# Altium PCB PCB1.PcbDoc
Units mil, origin at the board's own origin, x right, y up, seen from the top; angles counter-clockwise.
Board outline 3930 x 3930 mil, 2 copper layers (Top Layer, Bottom Layer); 22 components, 10 nets, 50 pads, 0 vias.
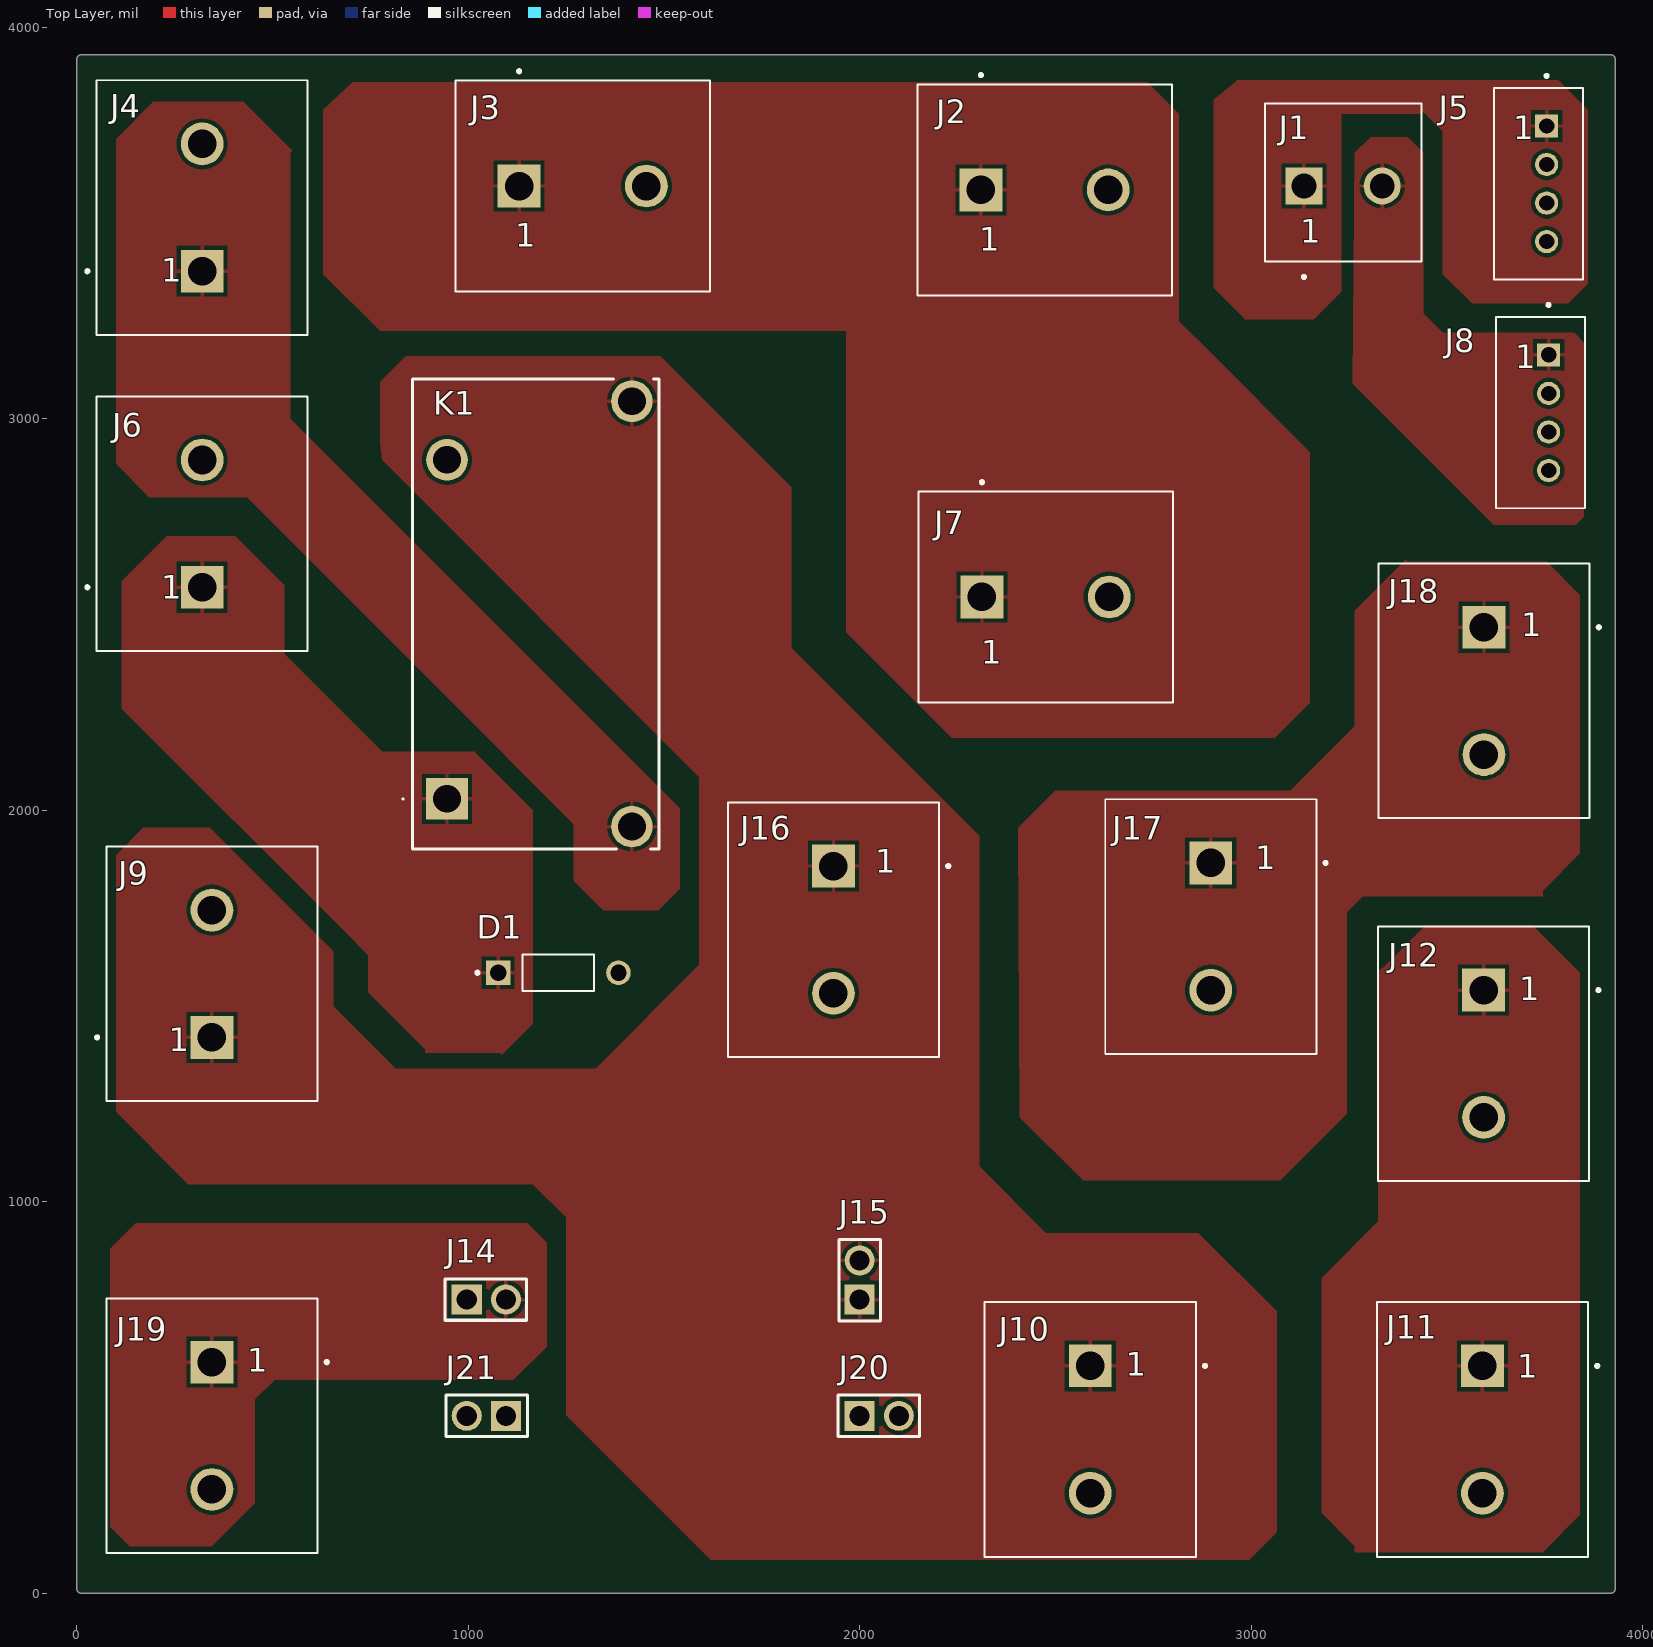
[diagram p0: Top Layer view]
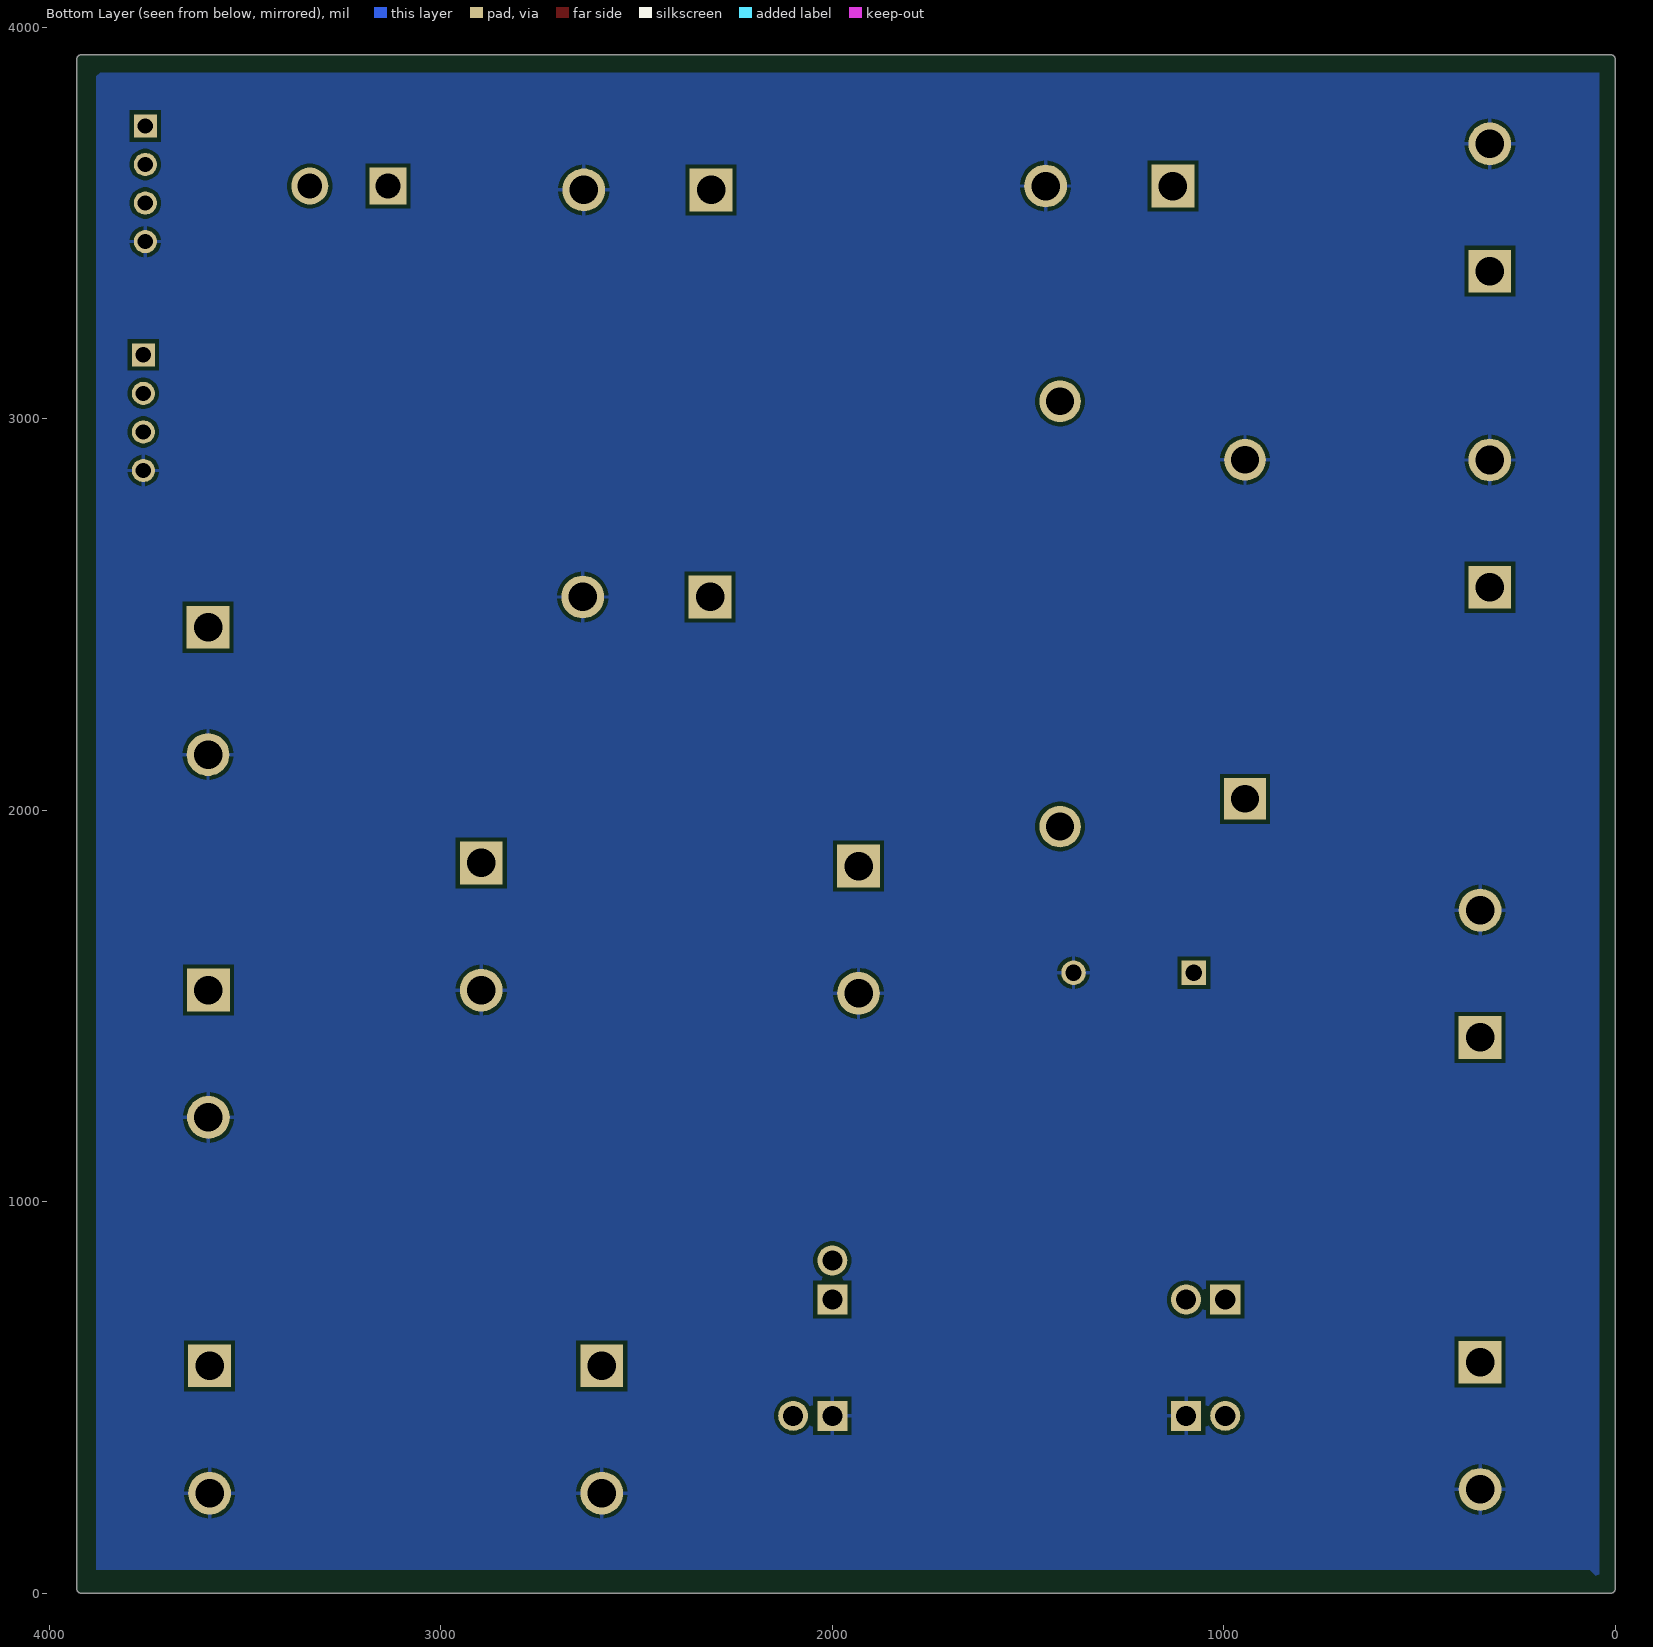
[diagram p1: Bottom Layer view, seen from below]
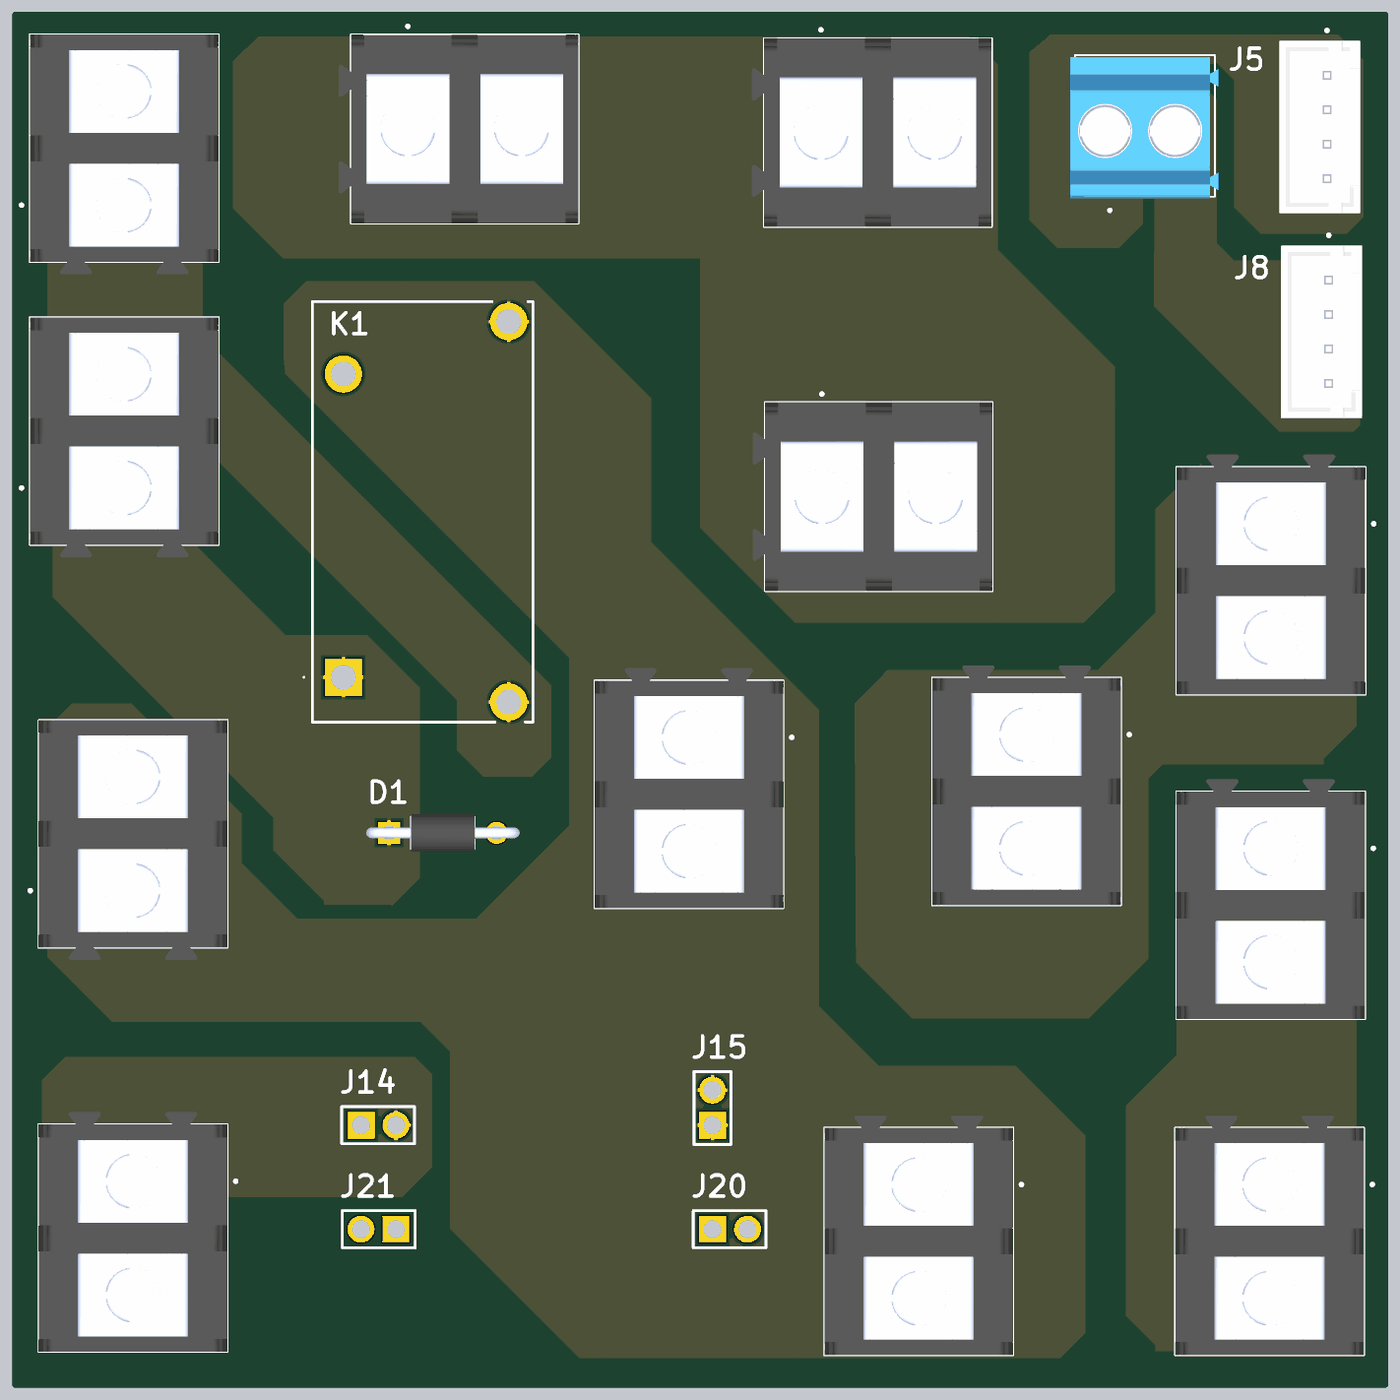
[diagram p2: 3D render of the assembled board from above, using the file's embedded part models]

## Layer stack, top to bottom
Top Solder: solder mask 0.4, Solder Resist, Dk 3.5
Top Layer: signal copper 1.4
Dielectric 1: dielectric 12.6, FR-4, Dk 4.8
Bottom Layer: signal copper 1.4
Bottom Solder: solder mask 0.4, Solder Resist, Dk 3.5

## Board outline
10,0 3920,0 ccw(c3920,10) 3930,10 3930,3920 ccw(c3920,3920) 3920,3930 10,3930 ccw(c10,3920) 0,3920 0,10 ccw(c10,10)

## Design rules (kind name [scope] priority, off if disabled: settings)
Clearance [All] p1: gap=10 ignorepadtopadclearanceinfootprint=FALSE
PolygonConnect [All] p1: connectstyle=Relief reliefconductorwidth=10 reliefentries=4 polygonreliefangle="90 Angle" airgapwidth=10
RoutingVias [All] p1: holewidth=28 width=50 viastyle="Through Hole" minholewidth=28 minwidth=50 maxholewidth=28 maxwidth=50
SolderMaskExpansion [All] p1: expansion=4 istentingtop=FALSE
SupplyNets "Schematic Supply Nets_8" [InNet('+VCC')] p1: voltage=0.000
SupplyNets "Schematic Supply Nets_6" [InNet('+5VCC_J')] p2: voltage=0.000
SupplyNets "Schematic Supply Nets_5" [InNet('+VBAT1')] p3: voltage=0.000
SupplyNets "Schematic Supply Nets_4" [InNet('+5VCC_M')] p4: voltage=0.000
SupplyNets "Schematic Supply Nets_3" [InNet('+12VCC_L')] p5: voltage=0.000
SupplyNets "Schematic Supply Nets_2" [InNet('GND')] p6: voltage=0.000
SupplyNets "Schematic Supply Nets_1" [InNet('+VBAT2')] p7: voltage=0.000
SupplyNets "Schematic Supply Nets" [InNet('+VCC2')] p8: voltage=0.000
Width [All] p1: maxlimit=500 minlimit=10 preferedwidth=10 minimp=50.000000 maximp=50.000000 favimp=50.000000
30 further rules are at their usual default settings.

## Components (designator, comment, footprint, x,y, rotation, side; value= is the part's Value field where it differs from the comment)
D1 "1N4007-T" DIOAD780W78L463D236 1230,1585 r0 top
J1 "TB007-508-02BE" CUI_TB007-508-02BE 3135,3595 r0 top
J2 "1977477-2" TE_1977477-2 2472.4,3585 r0 top
J3 "1977477-2" TE_1977477-2 1292.4,3595 r0 top
J4 "1977477-2" TE_1977477-2 320,3540 r90 top
J5 "B4B-XH-A(LF)(SN)" JST_B4B-XH-A(LF)(SN) 3734.33,3600.79 r90 top
J6 "1977477-2" TE_1977477-2 320,2732.4 r90 top
J7 "1977477-2" TE_1977477-2 2475,2545 r0 top
J8 "B4B-XH-A(LF)(SN)" JST_B4B-XH-A(LF)(SN) 3739.33,3015.79 r90 top
J9 "1977477-2" TE_1977477-2 345,1582.4 r90 top
J10 "1977477-2" TE_1977477-2 2589,418 r270 top
J11 "1977477-2" TE_1977477-2 3591,418 r270 top
J12 "1977477-2" TE_1977477-2 3594,1378 r270 top
J14 "61300211121" HDRV2W110P0X254_1X2_508X254X854P 996,750 r0 top
J15 "61300211121" HDRV2W110P0X254_1X2_508X254X854P 2000,750 r90 top
J16 "1977477-2" TE_1977477-2 1933,1695 r270 top
J17 "1977477-2" TE_1977477-2 2897,1703 r270 top
J18 "1977477-2" TE_1977477-2 3595,2305 r270 top
J19 "1977477-2" TE_1977477-2 345,427.4 r270 top
J20 "61300211121" HDRV2W110P0X254_1X2_508X254X854P 2000,453 r0 top
J21 "61300211121" HDRV2W110P0X254_1X2_508X254X854P 1096,453 r180 top
K1 "G4A-1A-E-DC12" G4A1AEDC12 945.56,2029.25 r90 top

## Footprints (in the part's own frame and the unit in brackets; to place one, negate y for a bottom-side part, rotate by r counter-clockwise, add the part's x,y. Pads: shape width x height; smd on the part's side, far side on the other; paste and mask are expansions set on the pad)
CUI_TB007-508-02BE [mm]
  rect 2.4x2.4 / inner round 2.4 / far side rect 2.4x2.4 hole 1.6: 1(0,0)
  round 2.4 hole 1.6: 2(5.08,0)
  silkscreen extent -2.54,-6 7.62,5.35, body extent -2.89,-5.04 7.87,5.21, height 14
DIOAD780W78L463D236 [mm]
  round 1.59 hole 1.06: A(3.905,0)
  rect 1.59x1.59 / inner round 1.59 / far side rect 1.59x1.59 hole 1.06: K(-3.905,0)
  silkscreen extent -5.35,-1.18 2.32,1.18, body extent -5.57,-1.35 5.57,1.35, height 2.7
G4A1AEDC12 [mm]
  rect 2.7x2.7 hole 1.8: 1(0,0)
  round 2.7 hole 1.8: 2(22,0) 3(25.8,-12) 4(-1.8,-12)
  silkscreen extent -3.25,-13.75 27.25,2.9
HDRV2W110P0X254_1X2_508X254X854P [mm]
  rect 1.95x1.95 / inner round 1.95 / far side rect 1.95x1.95 hole 1.3: 1(0,0)
  round 1.95 hole 1.3: 2(2.54,0)
  silkscreen extent -1.4,-1.35 3.89,1.35
JST_B4B-XH-A(LF)(SN) [mm]
  rect 1.508x1.508 / inner round 1.508 / far side rect 1.508x1.508 hole 1: 1(3.75,-0.525)
  round 1.508 hole 1: 2(1.25,-0.525) 3(-1.25,-0.525) 4(-3.75,-0.525)
  silkscreen extent -6.2,-2.88 7.1,2.88, body extent -6.2,-2.88 6.2,2.88, height 7
TE_1977477-2 [mm]
  rect 2.775x2.775 / inner round 2.775 / far side rect 2.775x2.775 hole 1.85: 1(-4.13,0)
  round 2.775 hole 1.85: 2(4.13,0)
  silkscreen extent -8.26,-6.85 8.26,7.55, body extent -9.15,-6.85 8.25,6.85, height 14.8

## Part data
D1: "Diode Standard 1000 V 1A Through Hole DO-41", Package="DO-41 NTE Electronics", Check_prices=https://www.snapeda.com/parts/1N4007/Yangjie+Electronic+Technology/view-part/?ref=eda, MF="Yangjie Technology", MP=1N4007, SnapEDA_Link=https://www.snapeda.com/parts/1N4007/Yangjie+Electronic+Technology/view-part/?ref=snap
J1: "2~24 Poles, Screw Type, Horizontal, 5.08 Pitch, 24~12 (AWG), Terminal Block Connector", Package=None, Check_prices=https://www.snapeda.com/parts/TB007-508-02BE/Same+Sky/view-part/?ref=eda, MF="Same Sky", MP=TB007-508-02BE, SnapEDA_Link=https://www.snapeda.com/parts/TB007-508-02BE/Same+Sky/view-part/?ref=snap
J2 J3 J4 J6 J7 J9 J10 J11 J12 J16 J17 J18 J19: "Buchanan, Module Dual Barrier, .325 CL, 2 Pos.", Package=None, Check_prices=https://www.snapeda.com/parts/1977477-2/TE+Connectivity+AMP+Connectors/view-part/?ref=eda, MF="TE Connectivity", MP=1977477-2, SnapEDA_Link=https://www.snapeda.com/parts/1977477-2/TE+Connectivity+AMP+Connectors/view-part/?ref=snap
J5 J8: "Connector Header Through Hole 4 position 0.098 (2.50mm)", Package=None, Check_prices=https://www.snapeda.com/parts/B4B-XH-A(LF)(SN)/JST+Sales+America+Inc./view-part/?ref=eda, MF="JST Sales", MP=B4B-XH-A(LF)(SN), SnapEDA_Link=https://www.snapeda.com/parts/B4B-XH-A(LF)(SN)/JST+Sales+America+Inc./view-part/?ref=snap
J14 J15 J20 J21: "WURTH ELEKTRONIK - 61300211121 - HEADER, 2.54MM, PIN, THT, VERTICAL, 2WAY", Manufacturer_Name="Wurth Elektronik", Mouser Part Number=710-61300211121, Datasheet Link=https://componentsearchengine.com/Datasheets/2/61300211121.pdf, Geometry.Height=8.54mm, Manufacturer_Part_Number=61300211121, Mouser Price/Stock=https://www.mouser.co.uk/ProductDetail/Wurth-Elektronik/61300211121?qs=t4813l51qx%252B1A5GYDQxPlw%3D%3D
K1: "General Purpose Relays SPST-NO 12VDC PCB & QC", Manufacturer_Name="Omron Electronics", Mouser Part Number=653-G4A-1AE-DC12, Datasheet Link=https://omronfs.omron.com/en_US/ecb/products/pdf/en-g4a.pdf, Geometry.Height=33.5mm, Manufacturer_Part_Number=G4A-1A-E-DC12, Mouser Price/Stock=https://www.mouser.co.uk/ProductDetail/Omron-Electronics/G4A-1A-E-DC12?qs=sQVrL4YZhsSR4KC%252B99SM1w%3D%3D

## Nets (pads, with @x,y where several pads share a name; then routed paths per layer and width w, separated by ;. In a path a pad name is that pad's centre, name@x,y a point inside that pad or via, vN(x,y) a via of type N, cw(c..) or ccw(c..) an arc to the next point about the centre after c; other vN are vias at no path point)
+5VCC_J: J11.1 J12.1
+5VCC_M: J14.2 J19.1
+12VCC_L: J17.1 J18.1
+VBAT1: J1.1 J5.1
+VBAT2: J1.2 J8.1
+VCC: J2.1 J3.1 J7.1
+VCC2: J9.1 J10.1 J15.1 J15.2 J16.1 K1.3
GND: D1.A J2.2 J3.2 J4.2 J5.4 J6.2 J7.2 J8.4 J9.2 J10.2 J11.2 J12.2 J16.2 J17.2 J18.2 J19.2 J20.1 J21.1 K1.2
NetD1_K: D1.K J6.1 K1.1
NetJ4_1: J4.1 K1.4
pads on no net: J5.2 J5.3 J8.2 J8.3 J14.1 J20.2 J21.2

## Polygon pours and split planes (outlines as drawn)
GND on Bottom Layer "GND_L02_P002" (solid, pour order 2): 40,3885 3870,3885 3880,3875 3880,60 65,60 40,35
+VBAT2 on Top Layer "+VBAT2_L01_P005" (solid, pour order 5): 3305.2,3720 3400,3720 3440,3680 3440,3270 3490,3220 3825,3220 3850,3195 3850,2750 3830,2730 3620,2730 3260,3090 3264.68,3679.8
+5VCC_M on Top Layer "+5VCC_M_L01_P017" (solid, pour order 17): 150,945 1150,945 1200,895 1200,630 1115,545 505,545 455,495 455,230 345,120 135,120 85,170 85,880
+VCC2 on Top Layer "+VCC2_L01_P016" (solid, pour order 16): 775,2940 775,3095 840,3160 1490,3160 1825,2825 1825,2415 2160,2080 2305,1935 2305,1090 2475,920 2865,920 3065,720 3065,155 2995,85 1620,85 1250,455 1250,960 1165,1045 285,1045 100,1230 100,1885 170,1955 340,1955 655,1640 655,1500 815,1340 1325,1340 1590,1605 1590,1685 1590,2085 780,2895
NetJ4_1 on Top Layer "NETJ4_1_L01_P013" (solid, pour order 13): 100,3715 195,3810 425,3810 550,3685 545,3680 545,3000 1540,2005 1540,1800 1485,1745 1345,1745 1270,1820 1270,1965 935,2300 795,2440 435,2800 185,2800 100,2885
NetD1_K on Top Layer "NETD1_K_L01_P011" (solid, pour order 11): 115,2585 230,2700 405,2700 530,2575 530,2400 780,2150 1015,2150 1165,2000 1165,1455 1085,1375 1080,1380 890,1380 890,1390 745,1535 745,1630 685,1690 115,2260
+5VCC_J on Top Layer "+5VCC_J_L01_P010" (solid, pour order 10): 3340,1600 3445,1705 3720,1705 3840,1585 3840,200 3745,105 3265,105 3265,120 3180,205 3180,805 3325,950 3325,1590
+12VCC_L on Top Layer "+12VCC_L_L01_P007" (solid, pour order 7): 2499.81,2050 3100,2050 3265,2215 3265,2510 3395,2640 3400,2635 3755,2635 3840,2550 3840,1890 3745,1795 3745,1780 3285,1780 3245,1740 3245,1225 3075,1055 2570.57,1055 2409.49,1215.21 2405.51,1955.19
+VCC on Top Layer "+VCC_L01_P006" (solid, pour order 6): 705,3860 2735,3860 2815,3780 2815,3250 2895,3170 3150,2915 3150,2275 3060,2185 2235,2185 1965,2455 1965,3225 775,3225 630,3370 630,3790
+VBAT1 on Top Layer "+VBAT1_L01_P004" (solid, pour order 4): 2960,3860 2965,3865 3785,3865 3860,3790 3860,3345 3810,3295 3565,3295 3490,3370 3490,3735 3440,3785 3435,3780 3230,3780 3230,3325 3160,3255 2985,3255 2905,3335 2905,3815

## Silkscreen, mask and mechanical layers (free items; w line width, h text height)
Top Overlay:
  text "1" at 3670,3715 h60
  text "1" at 3125,3450 h60
  text "1" at 1120,3440 h60
  text "1" at 2305,3430 h60
  text "1" at 215,3350 h60
  text "1" at 3675,3130 h60
  text "1" at 215,2540 h60
  text "1" at 3690,2445 h60
  text "1" at 2310,2375 h60
  text "1" at 3010,1850 h60
  text "1" at 2040,1840 h60
  text "1" at 3685,1515 h60
  text "1" at 235,1385 h60
  text "1" at 435,565 h60
  text "1" at 2680,555 h60
  text "1" at 3680,550 h60